# Altium PCB B228.PcbDoc
Units mm, origin at the board's own origin, x right, y up, seen from the top; angles counter-clockwise.
Board outline 40 x 22 mm, 4 copper layers (Top, Layer 1, Layer 2, Bottom), stack 1.564 mm thick; 15 components, 19 nets, 112 pads, 226 vias.
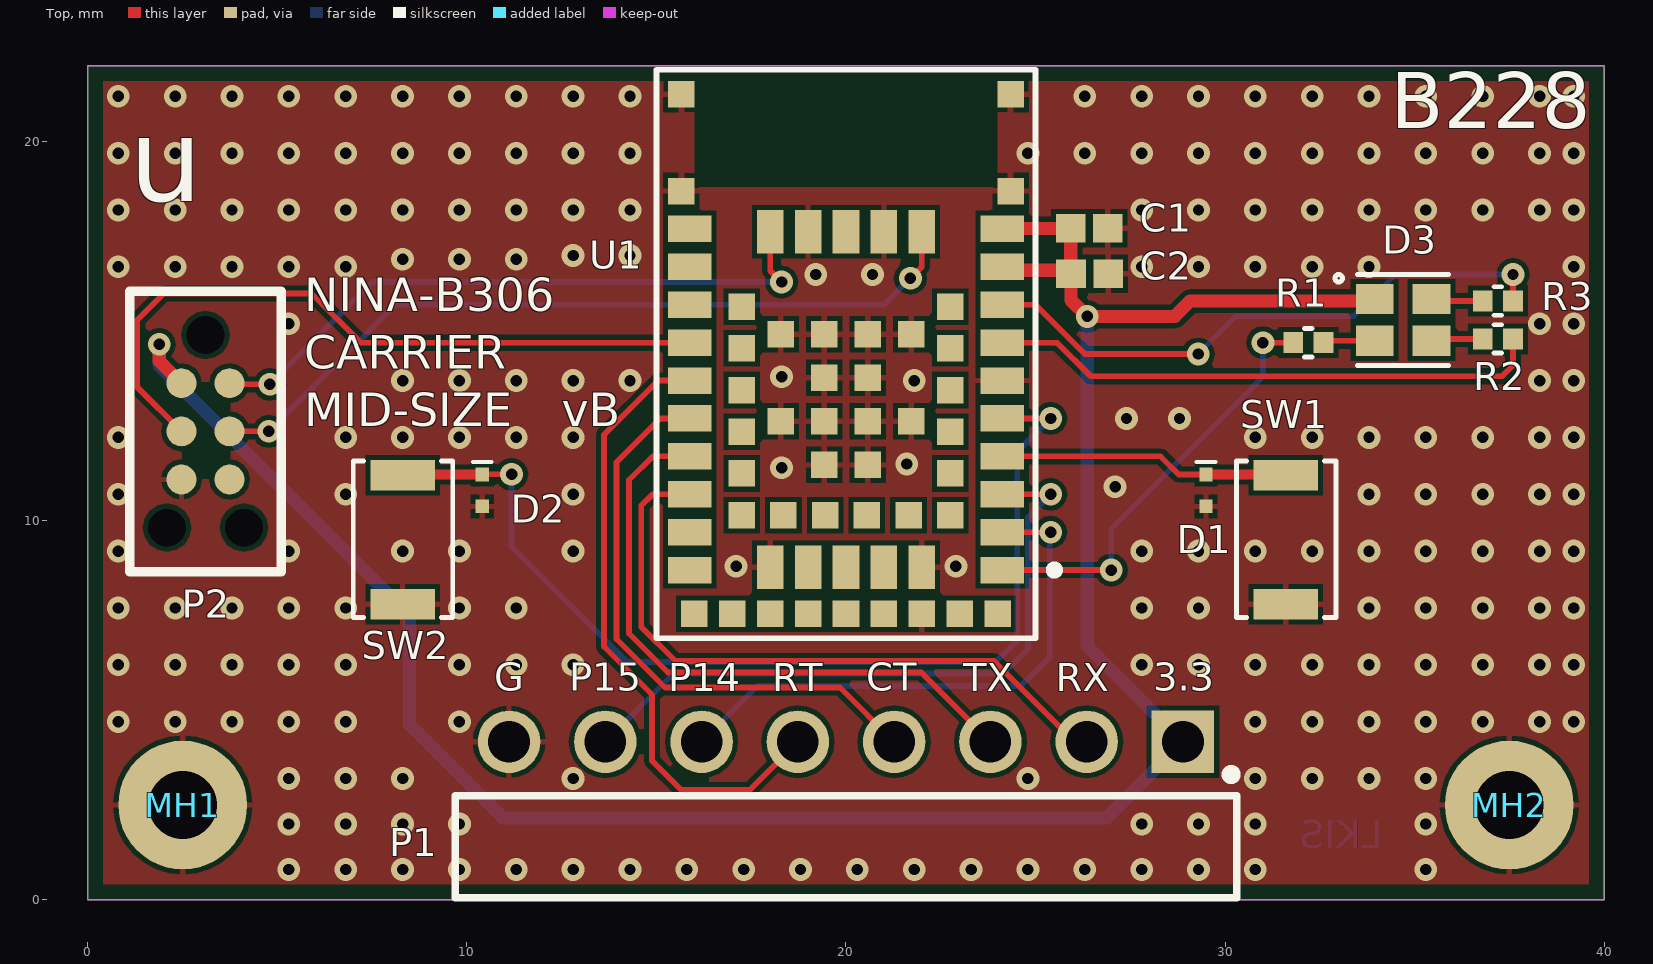
[diagram p0: Top view]
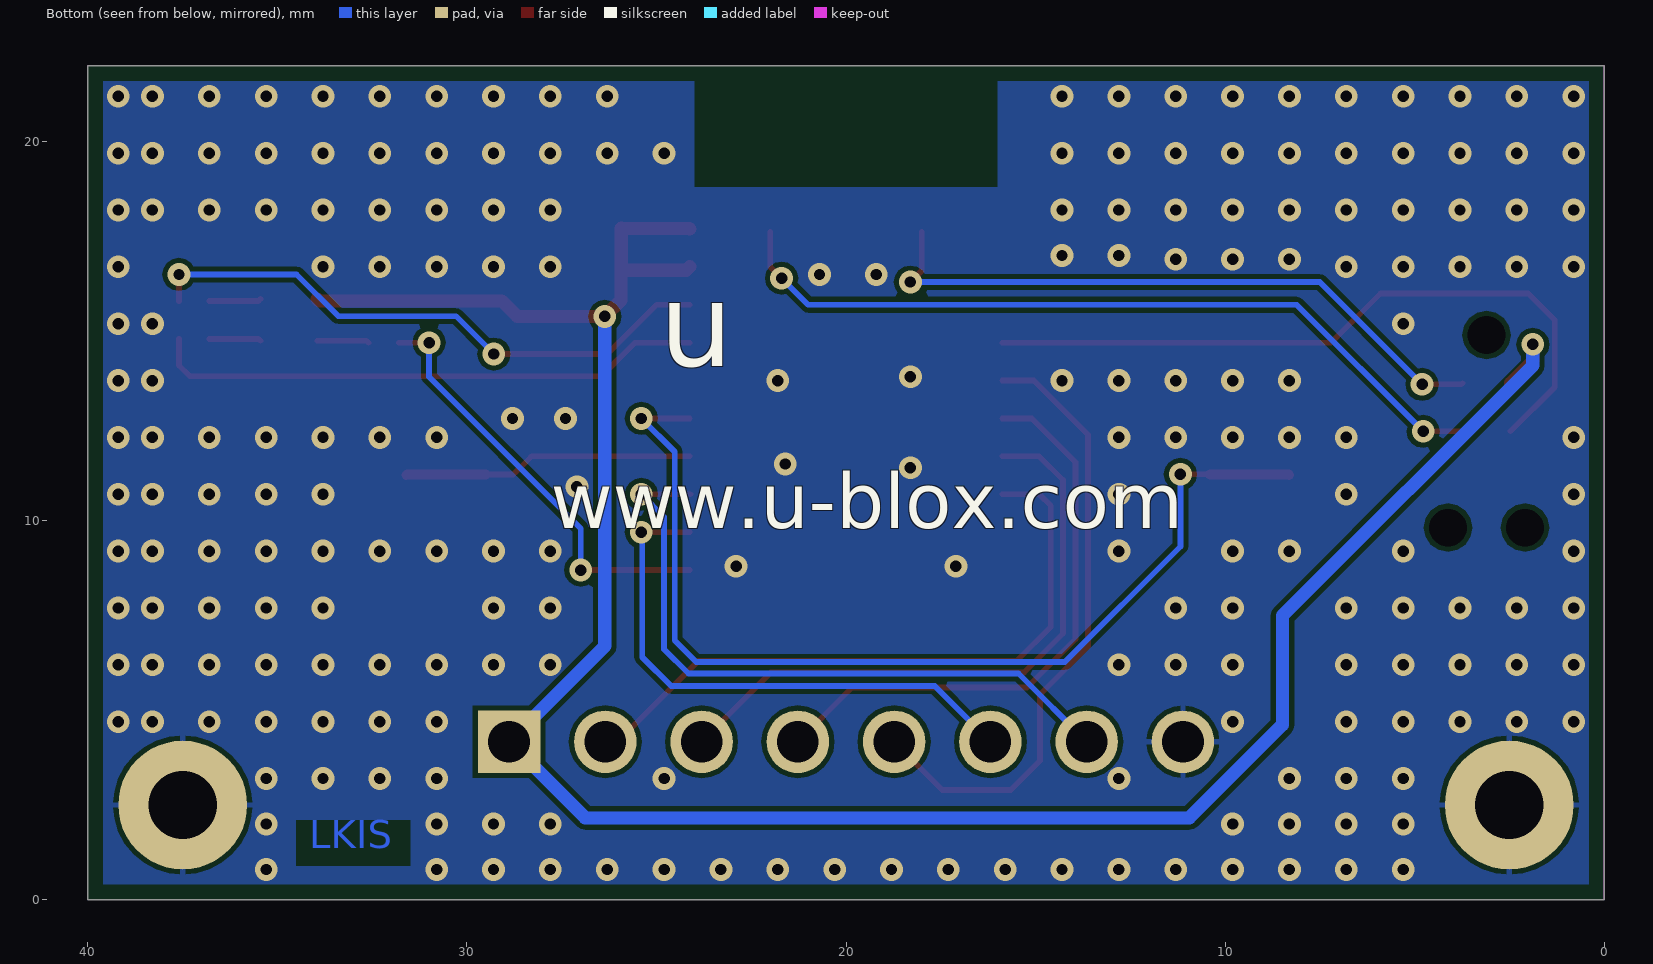
[diagram p1: Bottom view, seen from below]
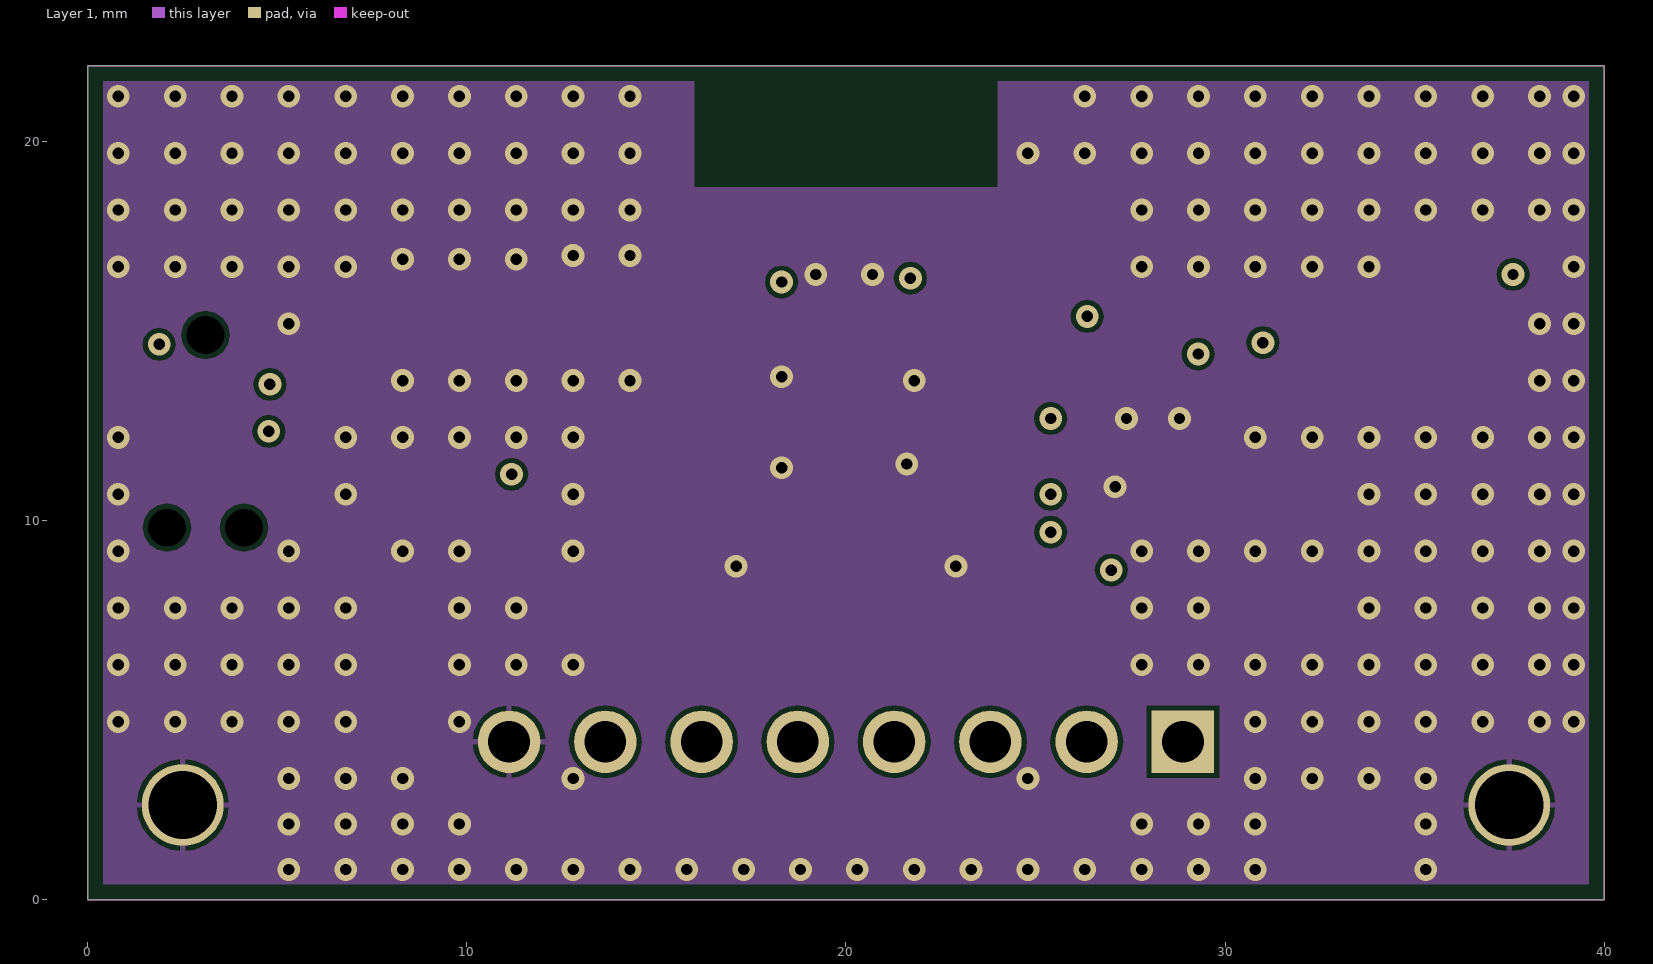
[diagram p2: Layer 1]
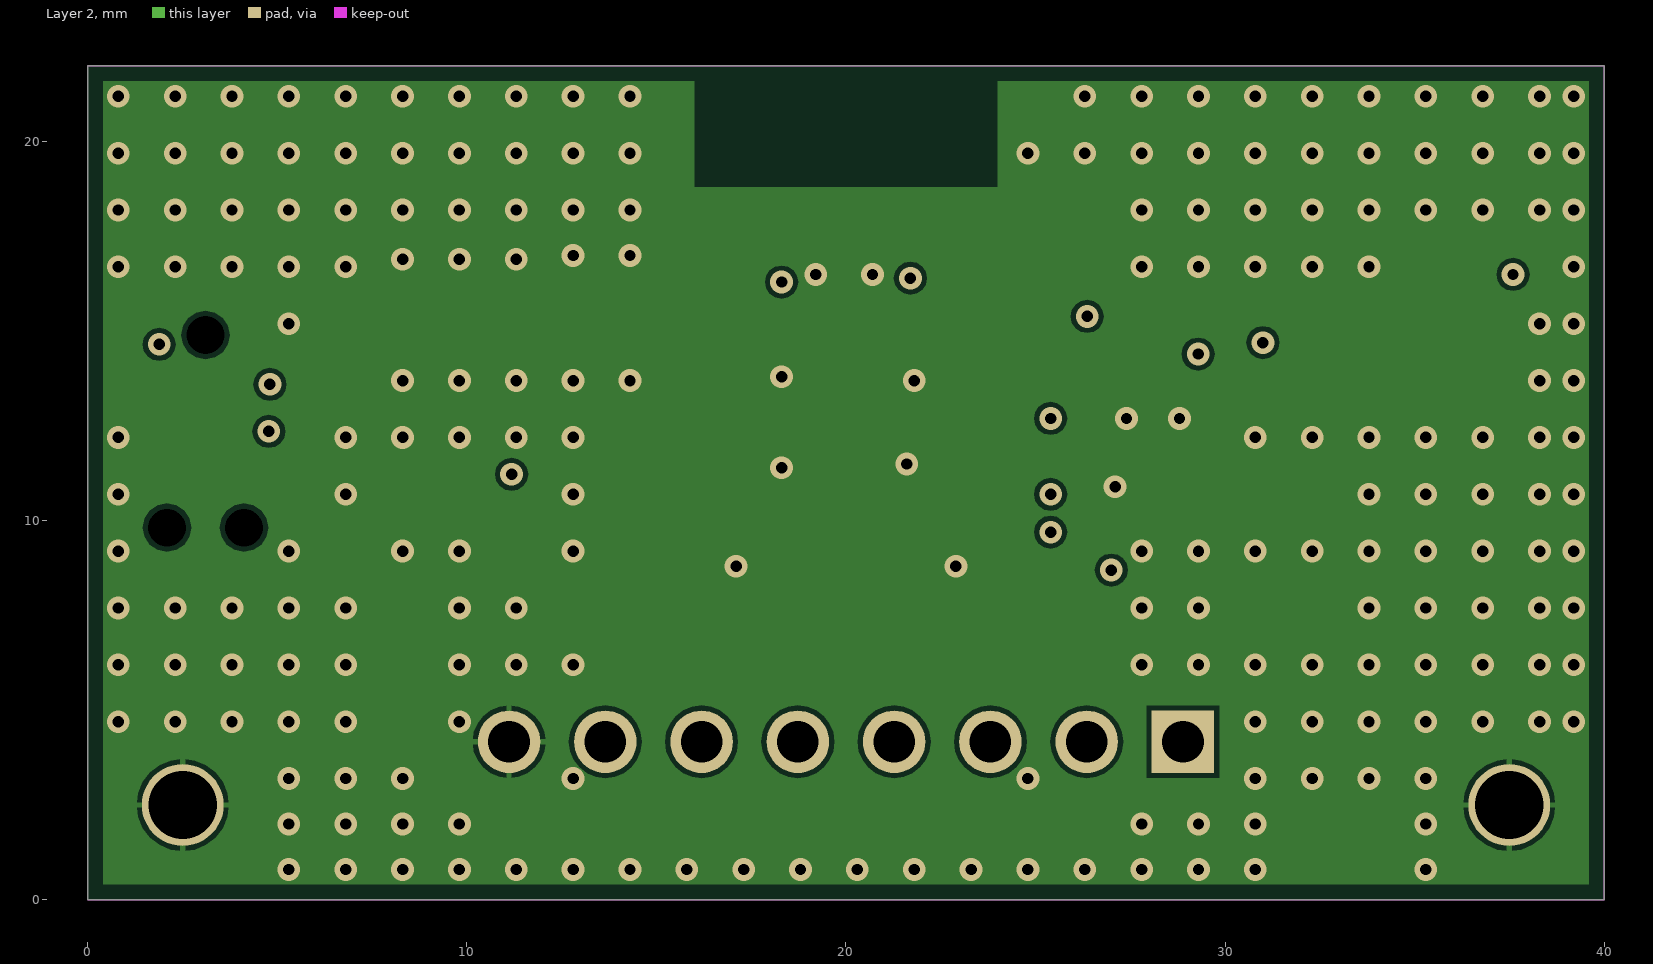
[diagram p3: Layer 2]

## Layer stack, top to bottom
Top Solder: solder mask 0.0203, Solder Resist, Dk 3.5
Top: signal copper 0.0406
Dielectric 1: prepreg 0.0711, PP-006, Dk 4.1
Layer 1: signal copper 0.035
Core: core 1.27, Core-043, Dk 4.3
Layer 2: signal copper 0.035
Dielectric 2: prepreg 0.0711, PP-006, Dk 4.1
Bottom: signal copper 0.0406
Bottom Solder: solder mask 0.0203, Solder Resist, Dk 3.5

## Board outline
0,0 40,0 40,22 0,22

## Design rules (kind name [scope] priority, off if disabled: settings)
BoardOutlineClearance [All] p1: gap=0.4 ignorepadtopadclearanceinfootprint=FALSE
Clearance "Stitching GND" [IsStitchingVia and InNet('GND') vs (IsVia and (Not IsStitchingVia)) Or IsPad] p1: gap=0.127 ignorepadtopadclearanceinfootprint=TRUE
Clearance Clearance_Poly [InPolygon vs OnLayer('Keep-Out Layer') OR (OnLayer('Multi-Layer') AND IsPad  AND Not(PadIsPlated))] p2: gap=0.127 ignorepadtopadclearanceinfootprint=TRUE
Clearance [All] p3: gap=0.127 ignorepadtopadclearanceinfootprint=FALSE except(0: Arc-Text Arc-Hole Track-Text Track-Hole SMDPad-Text SMDPad-Hole THPad-Text THPad-Hole Via-Text Via-Hole Fill-Text Fill-Hole Poly-Text Poly-Hole Region-Text Region-Hole Text-Text Text-Hole)
ComponentClearance [All] p1: gap=0.127 collisioncheckmode=3 verticalgap=0.254 showdistances=FALSE
DiffPairsRouting .14 [All] p1: maxlimit=0.254 minlimit=0.1 mostfreqgap=0.254 toplayer_maxgap=0.1 toplayer_prefgap=0.1 toplayer_minwidth=0.1 toplayer_maxwidth=0.1 toplayer_prefwidth=0.1 midlayer1_mingap=0.254 midlayer1_minwidth=0.381 midlayer1_maxwidth=0.381 midlayer1_prefwidth=0.381 midlayer2_mingap=0.254 midlayer2_minwidth=0.381 midlayer2_maxwidth=0.381 midlayer2_prefwidth=0.381 bottomlayer_maxgap=0.1 bottomlayer_prefgap=0.1 bottomlayer_minwidth=0.1 bottomlayer_maxwidth=0.1 bottomlayer_prefwidth=0.1 maxuncoupledlength=12.7
Height [All] p1: minheight=0 maxheight=25.4 prefheight=2.54
HoleSize [All] p1: absolutevalues=TRUE maxlimit=2540 minlimit=0.127 maxpercent=80.000 minpercent=20.000
HoleToHoleClearance [All] p1: gap=0.152 allowstackedmicrovias=TRUE
MinimumSolderMaskSliver [All] p1: minsoldermaskwidth=0.025
PlaneClearance [InPoly] p1: clearance=0.254
PlaneConnect [All] p1: pad.planeconnectstyle=Relief pad.reliefexpansion=0.508 pad.reliefentries=4 pad.reliefconductorwidth=0.254 pad.reliefairgap=0.254 via.planeconnectstyle=Direct via.reliefexpansion=0.508 via.reliefentries=4 via.reliefconductorwidth=0.254 via.reliefairgap=0.254
PolygonConnect ThermalVias [IsVia] p1: connectstyle=Direct reliefconductorwidth=0.254 reliefentries=4 polygonreliefangle="90 Angle" airgapwidth=0.254
PolygonConnect "PolygonConnect - Power" [InNetClass('')] p2: connectstyle=Relief reliefconductorwidth=0.254 reliefentries=4 polygonreliefangle="90 Angle" airgapwidth=0.127
PolygonConnect PolygonConnect-BGA [InComponentClass('')] p3: connectstyle=Relief reliefconductorwidth=0.152 reliefentries=4 polygonreliefangle="45 Angle" airgapwidth=0.152
PolygonConnect PolygonConnect-General [All] p4: connectstyle=Relief reliefconductorwidth=0.152 reliefentries=4 polygonreliefangle="90 Angle" airgapwidth=0.127
RoutingLayers [All] p1: top layer_v5=TRUE mid layer 1_v5=FALSE mid layer 2_v5=TRUE bottom layer_v5=TRUE
RoutingVias [All] p1: holewidth=0.3 width=0.6 viastyle="Through Hole" minholewidth=0.2 minwidth=0.5 maxholewidth=7 maxwidth=1
SMDEntry [All] p1 off: side=TRUE corner=TRUE anyangle=TRUE
SilkToBoardRegionClearance [All] p1 off:
SilkToSilkClearance [All] p1 off: silktosilkclearance=0.025
SilkToSolderMaskClearance [IsPad] p1 off: minsilkscreentomaskgap=0 clearancetoexposedcopper=TRUE
SolderMaskExpansion SolderMaskExpansion_via [IsVia] p1: expansion=-0.254 istentingtop=TRUE
SolderMaskExpansion [All] p2: expansion=0.05 istentingtop=FALSE
UnRoutedNet [All] p1: checkbadconnections=TRUE
ViasUnderSMD [All] p1: allowed=FALSE
Width [All] p1: maxlimit=2.54 minlimit=0.127 preferedwidth=0.152 toplayer_maxwidth=1 toplayer_prefwidth=0.152 bottomlayer_maxwidth=1 bottomlayer_prefwidth=0.152 minimp=50.000000 maximp=50.000000 favimp=50.000000
Width Width_1 [All] p2: maxlimit=0.254 minlimit=0.254 preferedwidth=0.254
17 further rules are at their usual default settings.

## Components (designator, comment, footprint, x,y, rotation, side; value= is the part's Value field where it differs from the comment)
C1 "Capacitor 0.1 uF +/- 5% 16 V 0402" CAPC1005X56X25ML10T15 26.417,17.719 r180 top value=100nF
C2 "Capacitor 0.1 uF +/- 5% 16 V 0402" CAPC1005X56X25ML10T15 26.427,16.519 r0 top value=100nF
D1 "110-00019" SOD-923 29.5,10.8 r270 top
D2 "110-00019" SOD-923 10.4,10.8 r270 top
D3 "115-00011" 4-PLCC 34.7,15.3 r180 top
MH1 "MH_M1.5DNP" MH_M1.5 2.5,2.5 r0 top
MH2 "MH_M1.5DNP" MH_M1.5 37.5,2.5 r0 top
P1 "61300811021" 61300811021 20,1.4 r0 top
P2 "TC2030-IDC-NLDNP" TC2030-IDC-NL 3.1,14.9 r270 top
R1 "180-00031499R" "RES 0402 HD" 32.2,14.7 r0 top value=499R
R2 "180-00098220R" "RES 0402 HD" 37.2,14.8 r180 top value=220R
R3 "180-00098220R" "RES 0402 HD" 37.2,15.8 r180 top value=220R
SW1 "135-00007" B3U-1000P 31.6,9.5 r270 top
SW2 "135-00007" B3U-1000P 8.3,9.5 r270 top
U1 "NINA-B306" NINA_LGA71R_1500X1000X223_PCB 20,14.4 r90 top

## Footprints (in the part's own frame and the unit in brackets; to place one, negate y for a bottom-side part, rotate by r counter-clockwise, add the part's x,y. Pads: shape width x height; smd on the part's side, far side on the other; paste and mask are expansions set on the pad)
4-PLCC [mm] "4 Pin Plastic Leaded Chip Carrier, 2mm x 2mm"
  rect 1x0.8 smd: 1(0.75,-0.55) 2(-0.75,-0.55) 3(-0.75,0.55) 4(0.75,0.55)
  silkscreen extent -1.2,-1.2 1.8,1.2, body extent -1.05,-1.05 1.05,1.05, height 1.01
61300811021 [mm]
  rect 1.65x1.65 hole 1.1: 1(8.89,2.77)
  round 1.65 hole 1.1: 2(6.35,2.77) 3(3.81,2.77) 4(1.27,2.77) 5(-1.27,2.77) 6(-3.81,2.77) 7(-6.35,2.77) 8(-8.89,2.77)
  silkscreen extent -10.31,-1.35 10.31,2.03, body extent -10.16,-7.27 10.16,3.09, height 2.58
B3U-1000P [mm] "Button Tactile, SMT 4mm x 2.5mm, height 1.2mm"
  rect 0.8x1.7 smd: 1(-1.7,0) 2(1.7,0)
  silkscreen extent -2.07,-1.3 2.05,1.33, body extent -2,-1.25 2,1.25, height 1.6
CAPC1005X56X25ML10T15 [mm] "Chip Capacitor, 2-Leads, Body 1.10x0.60mm, IPC Low Density"
  rect 0.78x0.74 smd: 1(-0.49,0) 2(0.49,0)
  body extent -0.55,-0.3 0.55,0.3, height 0.56
MH_M1.5 [mm] "Mounting Hole M1.5 Metric, 3.4mm diameter pad"
  round 3.4 / inner round 2.159 / far side round 3.4 hole 1.8: 1(0,0)
NINA_LGA71R_1500X1000X223_PCB [mm] "Stand-alone Bluetooth low energy module"
  rect 0.7x1.15 smd paste+0 mask+0.05: 1(-5.7,-4.125) 2(-4.7,-4.125) 3(-3.7,-4.125) 4(-2.7,-4.125) 5(-1.7,-4.125) 6(-0.7,-4.125) 7(0.3,-4.125) 8(1.3,-4.125) 9(2.3,-4.125) 10(3.3,-4.125) 16(3.3,4.125) 17(2.3,4.125) 18(1.3,4.125) 19(0.3,4.125) 20(-0.7,4.125) 21(-1.7,4.125) 22(-2.7,4.125) 23(-3.7,4.125) 24(-4.7,4.125) 25(-5.7,4.125)
  rect 1.15x0.7 smd paste+0 mask+0.05: 11(3.225,-2) 12(3.225,-1) 13(3.225,0) 14(3.225,1) 15(3.225,2) 26(-5.625,2) 27(-5.625,1) 28(-5.625,0) 29(-5.625,-1) 30(-5.625,-2)
  rect 0.7x0.7 smd paste+0 mask+0.05: 31(-4.25,-2.75) 32(-3.15,-2.75) 33(-2.05,-2.75) 34(-0.95,-2.75) 35(0.15,-2.75) 36(1.25,-2.75) 37(1.25,2.75) 38(0.15,2.75) 39(-0.95,2.75) 40(-2.05,2.75) 41(-3.15,2.75) 42(-4.25,2.75) 43(-4.25,1.65) 44(-4.25,0.55) 45(-4.25,-0.55) 46(-4.25,-1.65) 47(-6.85,4) 48(-6.85,3) 49(-6.85,2) 50(-6.85,1) 51(-6.85,0) 52(-6.85,-1) 53(-6.85,-2) 54(-6.85,-3) 55(-6.85,-4) 56(-2.925,-0.575) 57(-2.925,0.575) 58(-1.775,-1.725) 59(-1.775,-0.575) 60(-1.775,0.575) 61(-1.775,1.725) 62(-0.625,-0.575) 63(-0.625,0.575) 64(0.525,-1.725) 65(0.525,-0.575) 66(0.525,0.575) 67(0.525,1.725) 68(4.3,-4.35) 69(6.85,-4.35) 70(6.85,4.35) 71(4.3,4.35)
  Multi-Layer pour cut-out: 4.4,4 7.5,4 7.5,-4 4.4,-4
  silkscreen extent -7.5,-5.6 7.5,5, body extent -7.5,-5 7.5,5, height 2.31
"RES 0402 HD" [mm] "Chip Resistor, 2-Leads, Body 1.05x0.54mm, IPC High Density"
  rect 0.52x0.55 smd: 1(-0.4,0) 2(0.4,0)
  silkscreen extent -0.1,-0.38 0.1,0.38, body extent -0.55,-0.3 0.55,0.3, height 0.4
SOD-923 [mm] "SOD-923, 2-Leads, Body 1.25x2.50mm, IPC High Density,"
  rect 0.36x0.35 smd mask+0.05: 1(-0.42,0) 2(0.42,0)
  silkscreen extent -0.75,-0.25 -0.75,0.25, body extent -0.4,-0.3 0.4,0.3, height 0.4
TC2030-IDC-NL [mm] "Tag-Connect 6-Pin No Legs"
  round 0.9 hole 0.995 unplated: 0(0,0) 0(5.08,-1.016) 0(5.08,1.016)
  round 0.79 smd paste-0.39: 1(1.27,-0.635) 2(1.27,0.635) 3(2.54,-0.635) 4(2.54,0.635) 5(3.81,-0.635) 6(3.81,0.635)
  silkscreen extent -1.16,-2 6.24,2

## Part data
C1 C2: library part CMP-001-00001-4, "Chip Capacitor, 0.1 uF, +/- 5%, 16 V, 0402 (1005 Metric)", Capacitor Type=Ceramic, Case/Package=0402, Max Operating Temperature=125°C, Min Operating Temperature=-55°C, Tolerance=5%, Voltage Rating=16V, Mounting Technology=SM, Pins=2, RoHS Compliant=True
D1 D2: "Diode, ESD9B, 3.3V, ST5G, SOD-923", Manufacturer="ON Semiconductor", Manufacturer P/N=ESD9B3.3ST5G, MFG Package=SOD-923, Package Type=SOD, Part Name="Diode TVS 3.3V SOD-923", Voltage=3.3V, Arena Link=https://app.bom.com/a/4M5DJQ9Q9SR7DV4H?v=spec.summary, Body Size="0.8mm x 0.6mm", Component Mounting Type=SMT, Diode Type=TVS, Height=0.4mm, Item_Phase=Production, Part Number=110-00019, Part_Type=Diode, Pins=2, Revision=0A, Supplier 1=Arrow, Supplier Part Number 1=ESD9B3.3ST5G, Use in new designs=Yes
D3: "LED, RGB Diffused SMT, PLCC4 4 Pin", Color=RGB, Current="20mA Red, 10mA Green, 10mA, Blue", Manufacturer="Cree, Inc.", Manufacturer P/N=CLMVB-FKA-CFHEHLCBB7a363, MFG Package=PLCC4, Package Type=Custom, Part Name="LED RGB SMT 2mm x 2mm", Supplier Part Number 1=941-CLMVBFKACFHEHLCB, Voltage=5V, Arena Link=https://app.bom.com/a/UCV39GZGZIHY581D?v=spec.summary, Body Size="2.0mm x 2.0mm", Component Mounting Type=SMT, Height=1mm, Item_Phase=Production, Mounting Type=Vertical, Number of Circuits=3, Part Number=115-00011, Part_Type=LED, Pins=4, Revision=0A, Supplier 1=Mouser, Use in new designs=Yes, Vf="2V Red, 3V Green, 3V Blue"
MH1 MH2: library part MH_M1.5, "1.5M screw mounting hole, plated", Added By="Jeremy D", Added Date=7/9/2015, DNP=DNP, Height=0mm, Part Number=MH_M1.5, Size="3.4mm x 3.4mm", Type="Mounting Hole"
P1: library part CMP-1502-01075-1, "THT Angled Pin Header WR-PHD, Pitch 2.54 mm, Single Row, 8 pins", Contact Resistance=20mOhm, Manufacturer="Wurth Elektronik", Operating Temperature=-40to105degC, Rated Current=3A, Withstanding Voltage=500VAC, Working Voltage=250VAC, Datasheet URL=https://katalog.we-online.de/em/datasheet/6130xx11021.pdf, Gender=Male, Manufacturer Part Number=61300811021, Manufacturer URL=http://www.we-online.de, Mounting Technology=THT, Orientation=Angled, Package Reference=61300811021, Packaging=Bag, Part Number=61300811021, Pin Number=8, Pitch=2.54mm, Publisher=WurthElektronik, Row Number=Single
P2: library part TC2030-IDC-NL, "CON PADS FOR CBL PLUG-OF-NAILS 6-PIN NO LEGS", Manufacturer="TAG Connect", Added By="Paul B", Added Date=4/22/2015, DNP=DNP, Height=0, Manufacturer P/N=TC2030-IDC-NL, Part Number=TC2030-IDC-NL, Size="6.731mm x 12.446mm"
R1: library part 180-00031, "Resistor, 499ohm, 1%, 1/16W, 0402", Manufacturer="Rohm Semiconductor", Manufacturer 2="Samsung Electro-Mechanics America, Inc", Manufacturer P/N=MCR01MRTF4990, Manufacturer P/N 2=RC1005F4990CS, Part Name="RES SMD 499 OHM 1% 1/16W 0402", Power=1/16W, Supplier Part Number 1=RHM499CDCT-ND, Tolerance="+/- 1%", Alternate Footprint Ref="RES 0402", Arena Link=https://app.bom.com/a/Q8RZ5CVCVEDU1SS5?v=spec.summary, Component Mounting Type=SMT, Height=0.4mm, Item_Phase=Production, Part Number=180-00031, Part_Type=Resistor, Pins=2, Revision=0D, Size=0402, Supplier 1=Digi-Key, Supplier 2=Digi-Key, Supplier Part Number 2=1276-3992-1-ND, Use in new designs=Yes
R2 R3: library part 180-00098, "Resistor, 220ohm, 5%, 1/16W, 0402.", Manufacturer="Panasonic Electronic Components", Manufacturer 2="Samsung Electro-Mechanics America, Inc", Manufacturer P/N=ERJ-2GEJ221X, Manufacturer P/N 2=RC1005J221CS, Part Name="RES SMD 220 OHM 5% 1/16W 0402", Power=1/16W, Supplier Part Number 1=P220JCT-ND, Tolerance="+/- 5%", Alternate Footprint Ref="RES 0402", Arena Link=https://app.bom.com/a/8Q9HNUDUDWVBJC30?v=spec.summary, Component Mounting Type=SMT, Height=0.4mm, Item_Phase=Production, Part Number=180-00098, Part_Type=Resistor, Pins=2, Revision=0C, Size=0402, Supplier 1=Digi-Key, Supplier 2=Digi-Key, Supplier Part Number 2=1276-4360-1-ND, Use in new designs=Yes
SW1 SW2: "Button, Momentary SPST-NO, 0.05A, 12V, 3mm x 2.5mm", Current=50mA, Manufacturer="Omron Electronics Inc-EMC Div", Manufacturer P/N=B3U-1000P, Part Name="SWITCH TACTILE SPST-NO 0.05A 12V", Supplier Part Number 1=SW1020CT-ND, Voltage=12VDC, Arena Link=https://app.bom.com/a/TBU28FYFYHGV5FQ0?v=spec.summary, Body Size="3mm x 2.5mm", Component Mounting Type=SMT, Height=1.2mm, Item_Phase=Production, Part Number=135-00007, Part_Type=Button, Pins=2, Revision=0A, Supplier 1=Digi-Key, Switch/Button Circuit=SPST, Switch/Button Function=Off-Mom, Use in new designs=Yes
U1: "Stand-alone Bluetooth low energy module", Manufacturer=u-blox, Part Description="Stand-alone Bluetooth low energy module"

## Via types
v1: diameter 0.6, hole 0.3, Top to Bottom, tented both sides, 226 vias

## Nets (pads, with @x,y where several pads share a name; then routed paths per layer and width w, separated by ;. In a path a pad name is that pad's centre, name@x,y a point inside that pad or via, vN(x,y) a via of type N, cw(c..) or ccw(c..) an arc to the next point about the centre after c; other vN are vias at no path point)
3V3: C1.2 C2.1 D3.1 P1.1 P2.1 U1.9 U1.10 | length 62.5
  Top w0.35: v1(1.88,14.656) 1.88,14.215 P2.1 ; U1.9 24.216,16.609 25.846,16.609 C2.1@25.932,16.524 ; U1.10 24.134,17.709 25.917,17.709 C1.2 25.932,17.714 C2.1@25.932,16.524 ; D3.1 33.9,15.8 29.084,15.8 28.677,15.392 v1(26.365,15.392) 25.937,15.821 C2.1 C2.1@25.932,16.524
  Bottom w0.35: v1(1.88,14.656) 1.88,14.097 8.484,7.493 8.484,4.616 10.941,2.159 26.879,2.159 P1.1 26.365,6.695 v1(26.365,15.392)
BLUE: R3.1 U1.8 | length 15.6
  Top w0.152: U1.8 25,15.7 26.3,14.4 v1(29.291,14.4) ; R3.1 v1(37.6,16.5)
  Bottom w0.152: v1(29.291,14.4) 30.291,15.4 33.396,15.4 34.496,16.5 v1(37.6,16.5)
BUTTON1: D1.1 SW1.1 U1.4 | length 7.7
  Top w0.152: U1.4 28.3,11.7 28.78,11.22 D1.1
  Top w0.254: D1.1 31.58,11.22 SW1.1
BUTTON2: D2.1 SW2.1 U1.5 | length 27.1
  Top w0.152: D2.1 10.407,11.227 v1(11.176,11.227) ; U1.5 v1(25.4,12.7)
  Top w0.254: SW2.1 8.32,11.22 D2.1
  Bottom w0.152: v1(11.176,11.227) 11.176,9.324 14.227,6.273 23.952,6.273 24.521,6.842 24.521,11.821 v1(25.4,12.7)
CTS: P1.4 U1.21 | length 15.5
  Top w0.152: U1.21 15.1,12.7 13.945,11.545 13.945,6.883 15.228,5.6 19.84,5.6 P1.4
GND: C1.1 C2.2 D1.2 D2.2 MH1.1 MH2.1 P1.8 P2.5 SW1.2 SW2.2 U1.6 U1.12 U1.14 U1.26 U1.30 U1.53 U1.56 U1.57 U1.58 U1.59 U1.60 U1.61 U1.62 U1.63 U1.64 U1.65 U1.66 U1.67 U1.68 U1.69 U1.70 U1.71
  other v1: 5.3,0.8 6.8,0.8 8.3,0.8 9.8,0.8 11.3,0.8 12.8,0.8 14.3,0.8 15.8,0.8 17.3,0.8 18.8,0.8 20.3,0.8 21.8,0.8 23.3,0.8 24.8,0.8 26.3,0.8 27.8,0.8 29.3,0.8 30.8,0.8 35.3,0.8 5.3,2 6.8,2 8.3,2 9.8,2 27.8,2 29.3,2 30.8,2 35.3,2 5.3,3.2 6.8,3.2 8.3,3.2 12.8,3.2 24.8,3.2 30.8,3.2 32.3,3.2 33.8,3.2 35.3,3.2 0.8,4.7 2.3,4.7 3.8,4.7 5.3,4.7 6.8,4.7 9.8,4.7 30.8,4.7 32.3,4.7 33.8,4.7 35.3,4.7 36.8,4.7 38.3,4.7 39.2,4.7 0.8,6.2 2.3,6.2 3.8,6.2 5.3,6.2 6.8,6.2 9.8,6.2 11.3,6.2 12.8,6.2 27.8,6.2 29.3,6.2 30.8,6.2 32.3,6.2 33.8,6.2 35.3,6.2 36.8,6.2 38.3,6.2 39.2,6.2 0.8,7.7 2.3,7.7 3.8,7.7 5.3,7.7 6.8,7.7 9.8,7.7 11.3,7.7 27.8,7.7 29.3,7.7 33.8,7.7 35.3,7.7 36.8,7.7 38.3,7.7 39.2,7.7 17.1,8.8 22.9,8.8 0.8,9.2 5.3,9.2 8.3,9.2 9.8,9.2 12.8,9.2 27.8,9.2 29.3,9.2 30.8,9.2 32.3,9.2 33.8,9.2 35.3,9.2 36.8,9.2 38.3,9.2 39.2,9.2 0.8,10.7 6.8,10.7 12.8,10.7 33.8,10.7 35.3,10.7 36.8,10.7 38.3,10.7 39.2,10.7 27.1,10.9 18.3,11.4 21.6,11.5 0.8,12.2 6.8,12.2 8.3,12.2 9.8,12.2 11.3,12.2 12.8,12.2 30.8,12.2 32.3,12.2 33.8,12.2 35.3,12.2 36.8,12.2 38.3,12.2 39.2,12.2 27.4,12.7 28.8,12.7 8.3,13.7 9.8,13.7 11.3,13.7 12.8,13.7 14.3,13.7 21.8,13.7 38.3,13.7 39.2,13.7 18.3,13.8 5.3,15.2 38.3,15.2 39.2,15.2 19.2,16.5 20.7,16.5 0.8,16.7 2.3,16.7 3.8,16.7 5.3,16.7 6.8,16.7 27.8,16.7 29.3,16.7 30.8,16.7 32.3,16.7 33.8,16.7 39.2,16.7 8.3,16.9 9.8,16.9 11.3,16.9 12.8,17 14.3,17 0.8,18.2 2.3,18.2 3.8,18.2 5.3,18.2 6.8,18.2 8.3,18.2 9.8,18.2 11.3,18.2 12.8,18.2 14.3,18.2 27.8,18.2 29.3,18.2 30.8,18.2 32.3,18.2 33.8,18.2 35.3,18.2 36.8,18.2 38.3,18.2 39.2,18.2 0.8,19.7 2.3,19.7 3.8,19.7 5.3,19.7 6.8,19.7 8.3,19.7 9.8,19.7 11.3,19.7 12.8,19.7 14.3,19.7 24.8,19.7 26.3,19.7 27.8,19.7 29.3,19.7 30.8,19.7 32.3,19.7 33.8,19.7 35.3,19.7 36.8,19.7 38.3,19.7 39.2,19.7 0.8,21.2 2.3,21.2 3.8,21.2 5.3,21.2 6.8,21.2 8.3,21.2 9.8,21.2 11.3,21.2 12.8,21.2 14.3,21.2 26.3,21.2 27.8,21.2 29.3,21.2 30.8,21.2 32.3,21.2 33.8,21.2 35.3,21.2 36.8,21.2 38.3,21.2 39.2,21.2
GREEN: R2.1 U1.7 | length 14.7
  Top w0.152: U1.7 25.57,14.7 26.458,13.812 37.312,13.812 37.6,14.1 R2.1
NetD3_2: D3.2 R3.2 | length 1.4
  Top w0.152: D3.2 35.5,15.8 R3.2
NetD3_3: D3.3 R2.2 | length 1.4
  Top w0.152: D3.3 35.5,14.8 R2.2
NetD3_4: D3.4 R1.2 | length 1.4
  Top w0.152: R1.2 32.65,14.75 D3.4
nRESET: P2.3 U1.19 | length 18.8
  Top w0.152: P2.3 1.3,13.525 1.3,15.3 2,16 5.9,16 7.2,14.7 U1.19
P0.14: P1.6 U1.2 | length 14.7
  Top w0.152: U1.2 v1(25.4,9.7)
  Bottom w0.152: P1.6 17.659,5.639 24.613,5.639 25.375,6.401 25.375,9.675 v1(25.4,9.7)
P0.15: P1.7 U1.3 | length 17.8
  Top w0.152: U1.3@24.1,10.7 U1.3 v1(25.4,10.7)
  Bottom w0.152: P1.7 15.449,5.969 24.155,5.969 24.8,6.614 24.8,10.1 v1(25.4,10.7)
RED: R1.1 U1.1 | length 11.3
  Top w0.152: U1.1 v1(27,8.7) ; v1(31,14.7) R1.1
  Bottom w0.152: v1(27,8.7) 27,9.8 31,13.8 v1(31,14.7)
RTS: P1.5 U1.20 | length 16.7
  Top w0.152: U1.20 15.046,13.7 13.614,12.268 13.614,6.68 14.881,5.413 14.881,3.669 15.651,2.9 17.46,2.9 P1.5
RXD: P1.2 U1.23 | length 17.6
  Top w0.152: U1.23 14.9,10.7 14.6,10.4 14.6,7.2 15.5,6.3 23.9,6.3 26.03,4.17 P1.2
SWCLK: P2.4 U1.11 | length 21
  Top w0.152: P2.4 v1(4.77,12.36) ; v1(21.7,16.4) 22,16.7 U1.11
  Bottom w0.152: v1(4.77,12.36) 8.11,15.7 21,15.7 v1(21.7,16.4)
SWDIO: P2.2 U1.15 | length 17.1
  Top w0.152: P2.2 3.765,13.6 v1(4.8,13.6) ; U1.15 18,16.6 v1(18.3,16.3)
  Bottom w0.152: v1(4.8,13.6) 7.5,16.3 v1(18.3,16.3)
TXD: P1.3 U1.22 | length 16.6
  Top w0.152: U1.22 14.9,11.7 14.275,11.075 14.275,7.025 15.304,5.996 21.984,5.996 P1.3
pads on no net: P2.0 P2.6 U1.13 U1.16 U1.17 U1.18 U1.24 U1.25 U1.27 U1.28 U1.29 U1.31 U1.32 U1.33 U1.34 U1.35 U1.36 U1.37 U1.38 U1.39 U1.40 U1.41 U1.42 U1.43 U1.44 U1.45 U1.46 U1.47 U1.48 U1.49 U1.50 U1.51 U1.52 U1.54 U1.55

## Polygon pours and split planes (outlines as drawn)
GND on Bottom "NONET_L01_P-001" (solid, remove dead copper, pour order 22): 0,0 40,0 40,22 0,22
GND on Layer 2 "NONET_L01_P-001" (solid, pour order 23): 0,0 40,0 40,22 0,22
GND on Layer 1 "NONET_L01_P-001" (solid, pour order 24): 0,0 40,0 40,22 0,22
GND on Top "NONET_L01_P-001" (solid, remove dead copper, pour order 25): 0,0 40,0 40,22 0,22

## Keep-outs
Keep-Out Layer:
  the board outline again, w0.025

## Other copper
Top:
  pour cut-out: 2.851,13.654 3.376,13.654 3.751,13.279 3.751,11.454 3.401,11.104 2.826,11.104 2.481,11.449 2.481,13.284 2.551,13.354
Bottom:
  pour cut-out: 31.5,0.9 31.5,2.1 34.5,2.1 34.5,0.9
  text "LKIS" at 34.158,1.113 h1.27

## Silkscreen, mask and mechanical layers (free items; w line width, h text height)
Top Overlay:
  text "B228" at 34.369,19.87 h2.54
  text "u" at 1.089,17.704 h3.81
  text "NINA-B306 / CARRIER / MID-SIZE" at 5.7,12.2 h1.52
  text "vB" at 12.5,12.2 h1.52
  text "G" at 10.724,5.263 h1.27
  text "P15" at 12.702,5.263 h1.27
  text "CT" at 20.534,5.263 h1.27
  text "3.3" at 28.111,5.265 h1.27
  text "P14" at 15.307,5.25 h1.27
  text "RT" at 18.05,5.25 h1.27
  text "TX" at 23.092,5.25 h1.27
  text "RX" at 25.535,5.25 h1.27
Bottom Overlay:
  text "u" at 24.911,13.348 h3.81
  text "www.u-blox.com" at 27.796,9.31 h2.5
Route Tool Path:
  the board outline again, w0.127